# Altium PCB PCB2.PcbDoc
Units mm, origin at the board's own origin, x right, y up, seen from the top; angles counter-clockwise.
Board outline 85.85 x 65.79 mm, 2 copper layers (Top Layer, Bottom Layer); 18 components, 5 nets, 113 pads, 12 vias.
Unrouted connection lines stored in the file: 12.
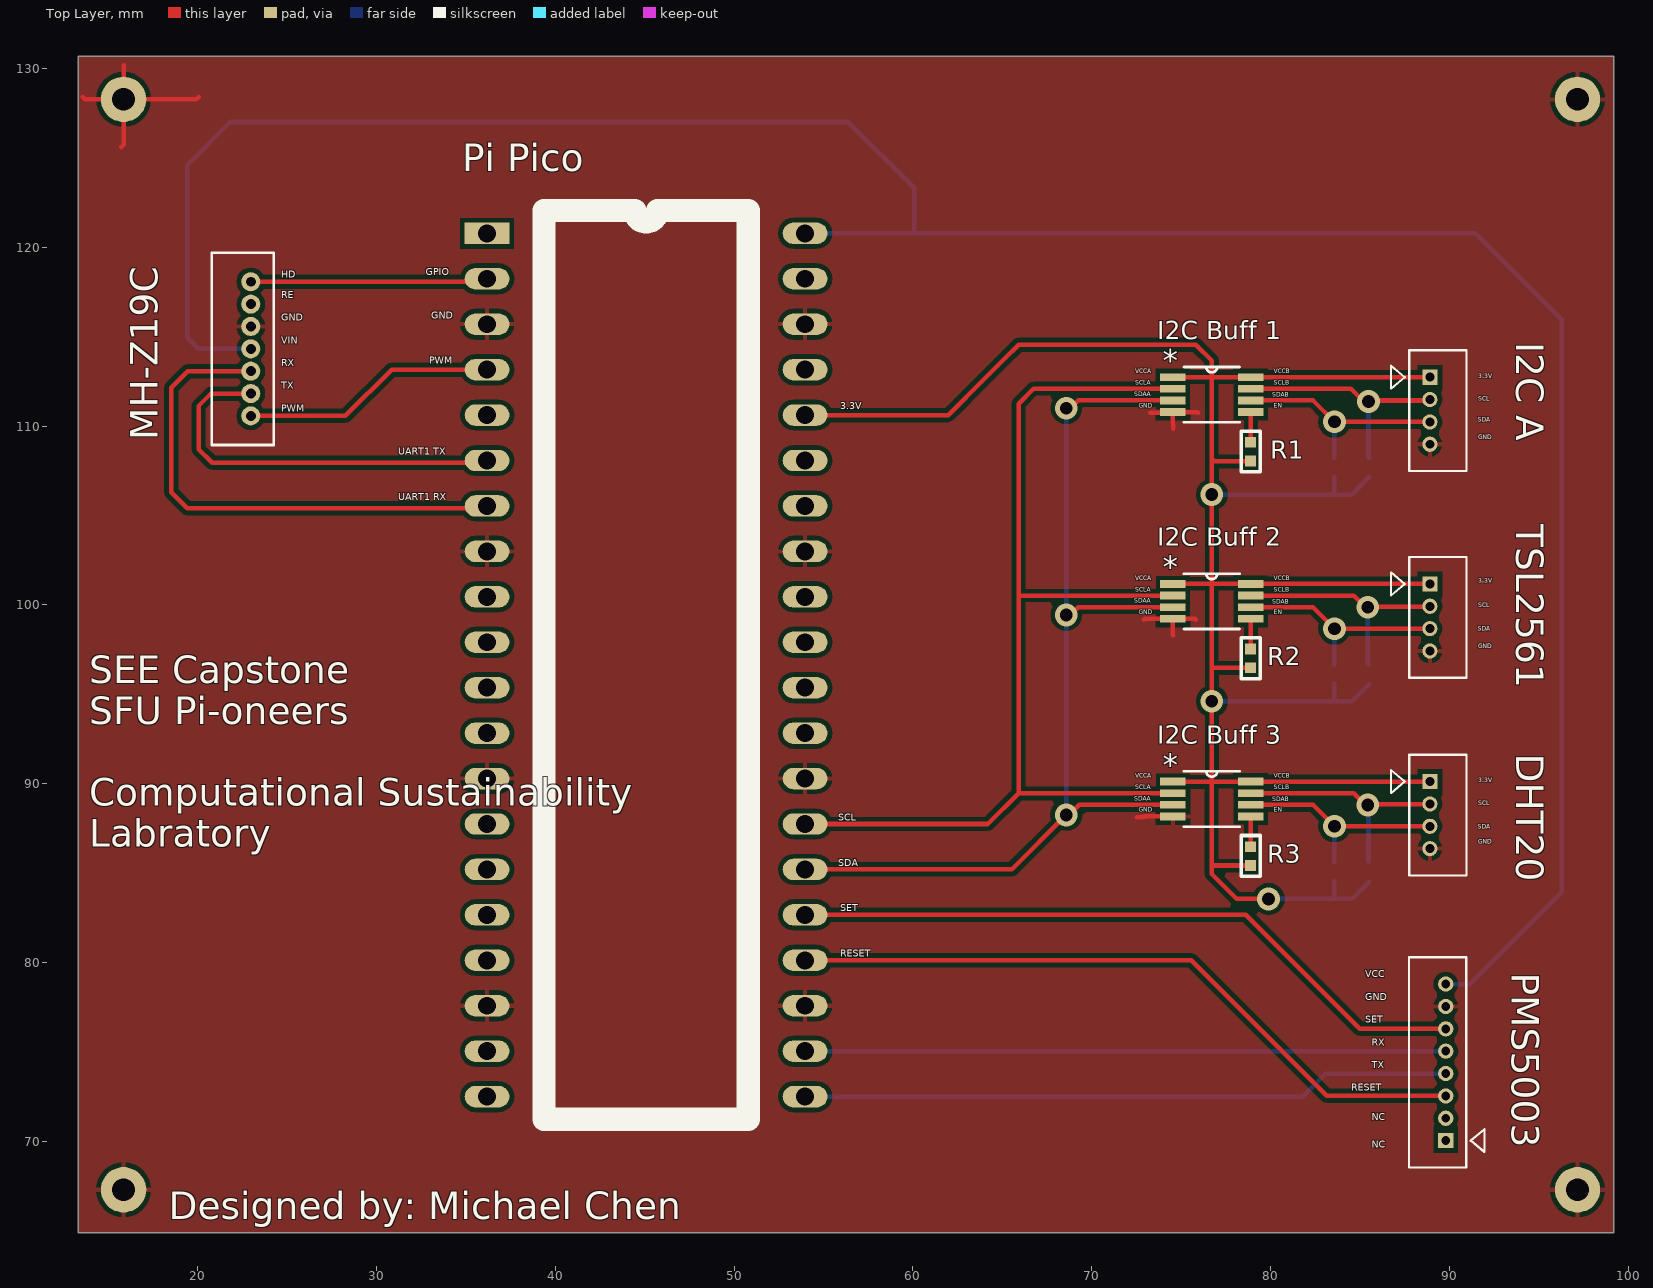
[diagram p0: Top Layer view]
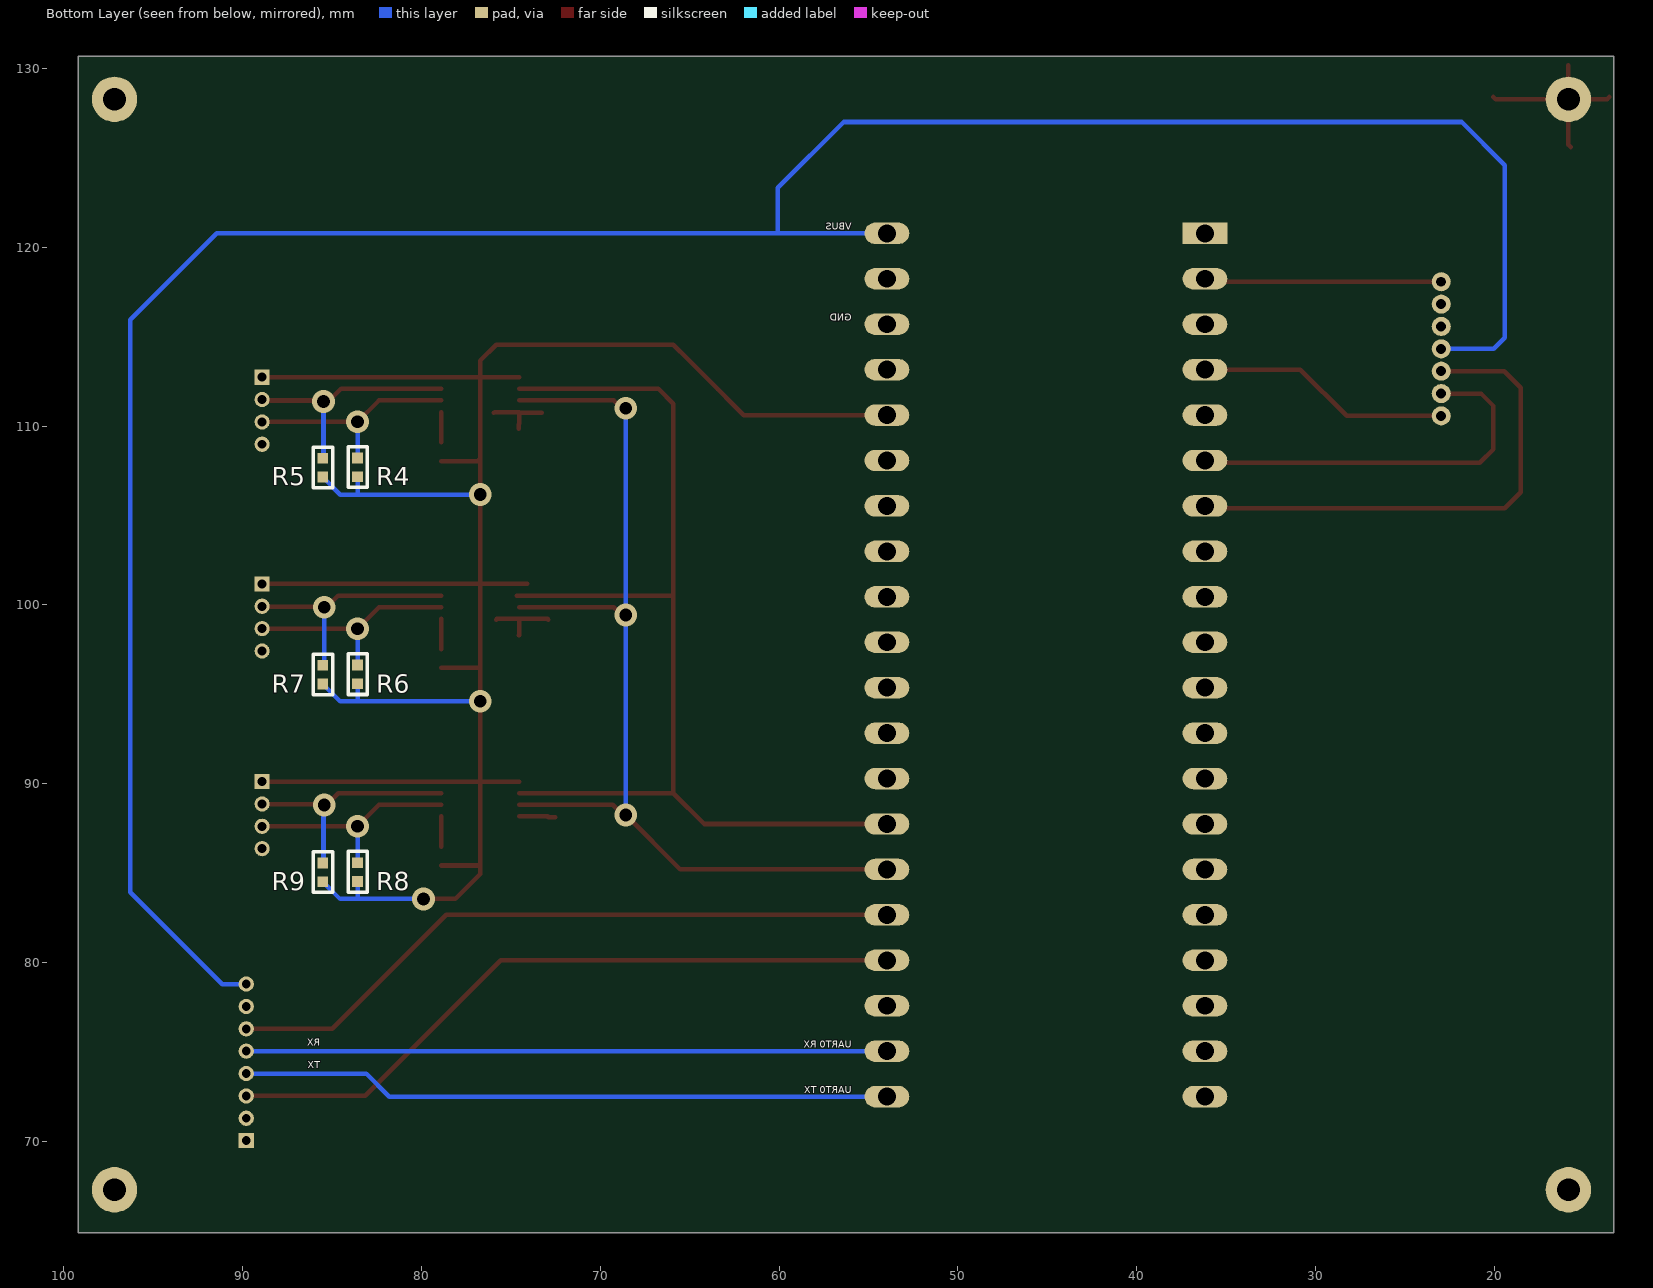
[diagram p1: Bottom Layer view, seen from below]
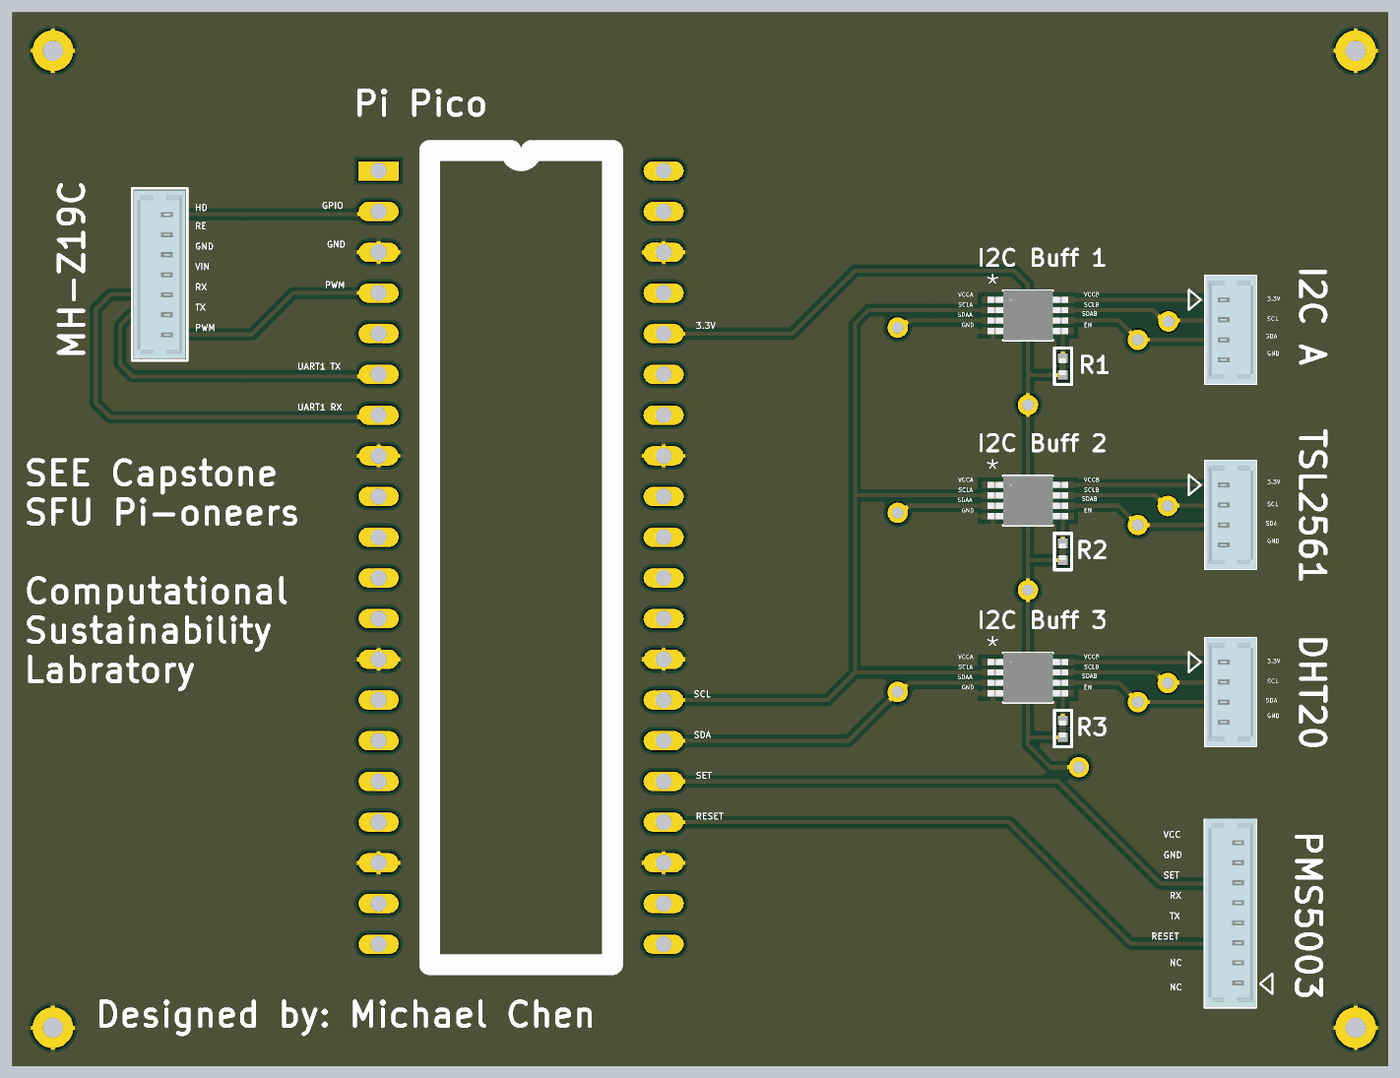
[diagram p2: 3D render of the assembled board from above, using the file's embedded part models]
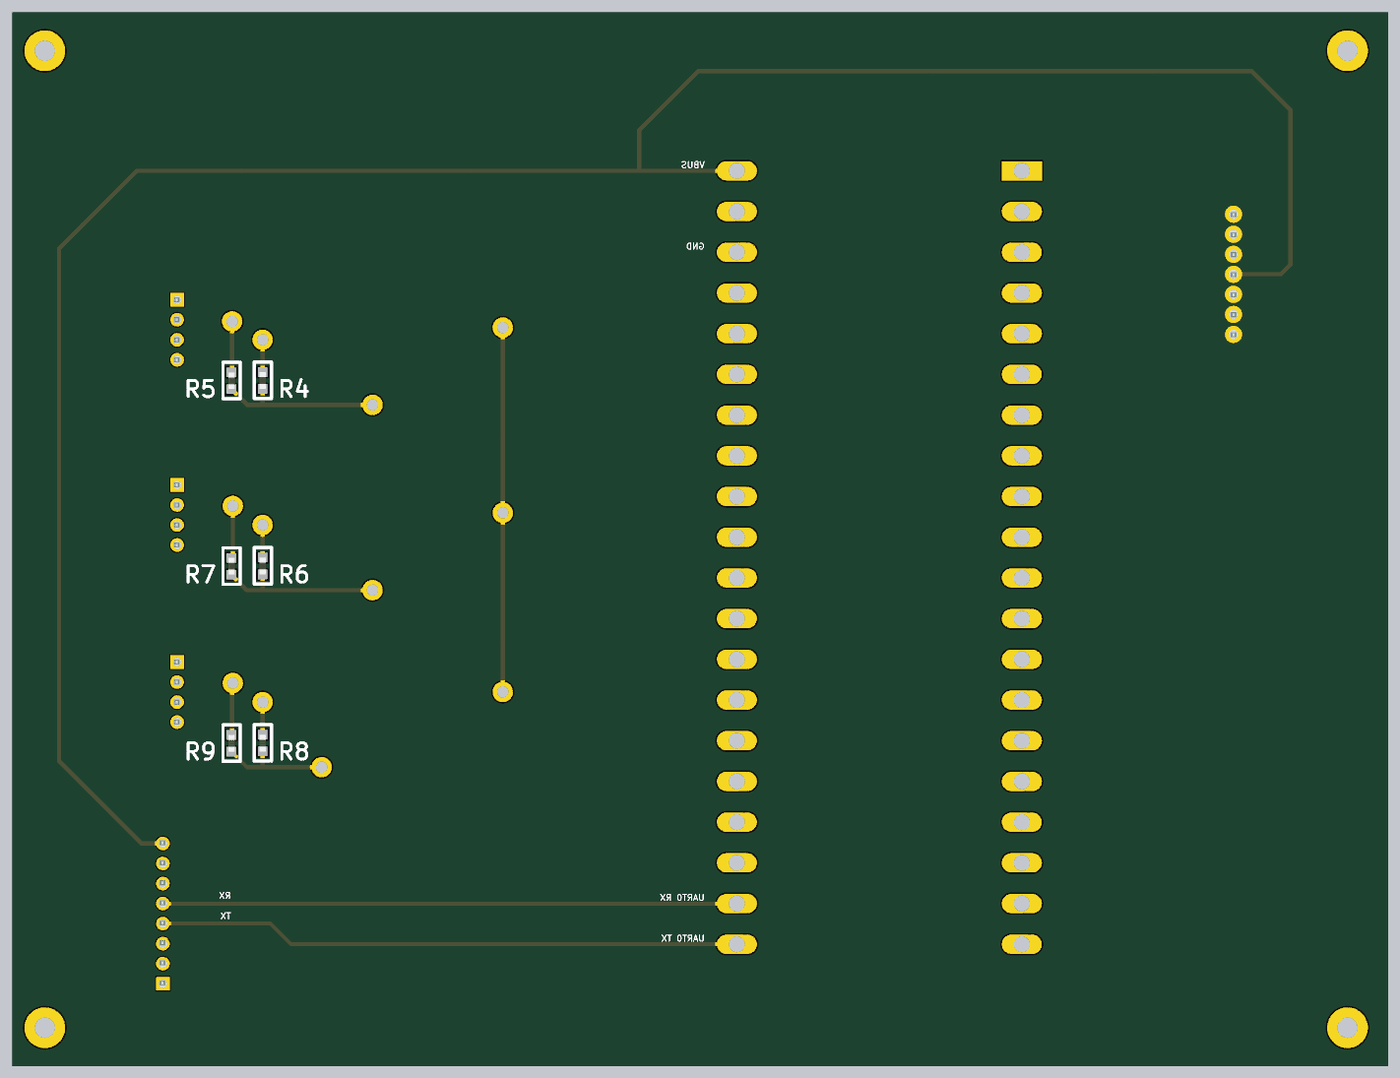
[diagram p3: 3D render of the assembled board from below, using the file's embedded part models]

## Layer stack, top to bottom
Top Solder: solder mask 0.0102, Solder Resist, Dk 3.5
Top Layer: signal copper 0.0356
Dielectric 1: dielectric 0.32, FR-4, Dk 4.8
Bottom Layer: signal copper 0.0356
Bottom Solder: solder mask 0.0102, Solder Resist, Dk 3.5

## Board outline
13.335,64.897 99.187,64.897 99.187,130.683 13.335,130.683

## Design rules (kind name [scope] priority, off if disabled: settings)
Clearance [All] p1: gap=0.254 ignorepadtopadclearanceinfootprint=FALSE
PolygonConnect [All] p1: connectstyle=Relief reliefconductorwidth=0.254 reliefentries=4 polygonreliefangle="90 Angle" airgapwidth=0.254
RoutingVias [All] p1: holewidth=0.711 width=1.27 viastyle="Through Hole" minholewidth=0.711 minwidth=1.27 maxholewidth=0.711 maxwidth=1.27
SolderMaskExpansion [All] p1: expansion=0.102 istentingtop=FALSE
Width [All] p1: maxlimit=0.254 minlimit=0.254 preferedwidth=0.254
30 further rules are at their usual default settings.

## Components (designator, comment, footprint, x,y, rotation, side; value= is the part's Value field where it differs from the comment)
DHT20 "Comment" "1X4 HEADER" 88.9,90.129 r90 top
"I2C A" "Comment" "1X4 HEADER" 88.9,112.735 r90 top
"I2C Buff 1" "Comment" DGK8 76.708,111.76 r0 top
"I2C Buff 2" "Comment" DGK8 76.708,100.203 r0 top
"I2C Buff 3" "Comment" DGK8 76.708,89.154 r0 top
MH-Z19C "Comment" "1X7 HEADER" 22.987,110.57 r270 top
"Pi Pico" "Comment" "PI PICO" 36.195,120.777 r0 top
PMS5003 "Comment" "1X8 HEADER" 89.789,70.057 r270 top
R1 "Comment" RESISTOR 78.88,108.568 r90 top
R2 "Comment" RESISTOR 78.88,97.011 r90 top
R3 "Comment" RESISTOR 78.88,85.962 r90 top
R4 "Comment" RESISTOR 83.566,107.696 r90 bottom
R5 "Comment" RESISTOR 85.509,107.679 r90 bottom
R6 "Comment" RESISTOR 83.566,96.122 r90 bottom
R7 "Comment" RESISTOR 85.509,96.105 r90 bottom
R8 "Comment" RESISTOR 83.566,85.073 r90 bottom
R9 "Comment" RESISTOR 85.509,85.056 r90 bottom
TSL2561 "Comment" "1X4 HEADER" 88.9,101.178 r90 top

## Footprints (in the part's own frame and the unit in brackets; to place one, negate y for a bottom-side part, rotate by r counter-clockwise, add the part's x,y. Pads: shape width x height; smd on the part's side, far side on the other; paste and mask are expansions set on the pad)
"1X4 HEADER" [mm]
  rect 0.85x0.85 / inner round 1.524 / far side rect 0.85x0.85 hole 0.5 paste-2539.97 mask+0.076: 1(0,0)
  round 0.85 / inner round 1.524 / far side round 0.85 hole 0.5 paste-2539.97 mask+0.076: 2(-1.25,0) 3(-2.5,0) 4(-3.75,0)
  silkscreen extent -5.25,-2.05 1.5,2.17, body extent -5.25,-2.07 1.5,1.13, height 4.21
"1X7 HEADER" [mil]
  round 42 / inner round 60 / far side round 42 hole 22 paste-99999 mask+0: 1(0,0) 2(-49.21,0) 3(-98.43,0) 4(-147.64,0) 5(-196.85,0) 6(-246.06,0) 7(-295.28,0)
  silkscreen extent -359,-86 64,50, body extent -353,-81 60,45, height 166
"1X8 HEADER" [mm]
  rect 0.85x0.85 / inner round 1.524 / far side rect 0.85x0.85 hole 0.5 paste-2539.97 mask+0.076: 1(0,0)
  round 0.85 / inner round 1.524 / far side round 0.85 hole 0.5 paste-2539.97 mask+0.076: 2(-1.25,0) 3(-2.5,0) 4(-3.75,0) 5(-5,0) 6(-6.25,0) 7(-7.5,0) 8(-8.75,0)
  silkscreen extent -10.25,-2.05 1.5,2.17, body extent -10.3,-2.03 1.45,1.17, height 4.21
DGK8 [mil]
  rect 56x17 smd paste-28 mask-28: 1(-85.5,38.39) 2(-85.5,12.8) 3(-85.5,-12.8) 4(-85.5,-38.39) 5(85.5,-38.39) 6(85.5,-12.8) 7(85.5,12.8) 8(85.5,38.39)
  silkscreen extent -61,-61 61,61, body extent -99,-61 99,61, height 43
"PI PICO" [mm]
  rect 2.5x1.2 hole 1: 1(0,0)
  oval 2.5x1.2 hole 1: 2(0,-2.54) 3(0,-5.08) 4(0,-7.62) 5(0,-10.16) 6(0,-12.7) 7(0,-15.24) 8(0,-17.78) 9(0,-20.32) 10(0,-22.86) 11(0,-25.4) 12(0,-27.94) 13(0,-30.48) 14(0,-33.02) 15(0,-35.56) 16(0,-38.1) 17(0,-40.64) 18(0,-43.18) 19(0,-45.72) 20(0,-48.26) 21(17.78,-48.26) 22(17.78,-45.72) 23(17.78,-43.18) 24(17.78,-40.64) 25(17.78,-38.1) 26(17.78,-35.56) 27(17.78,-33.02) 28(17.78,-30.48) 29(17.78,-27.94) 30(17.78,-25.4) 31(17.78,-22.86) 32(17.78,-20.32) 33(17.78,-17.78) 34(17.78,-15.24) 35(17.78,-12.7) 36(17.78,-10.16) 37(17.78,-7.62) 38(17.78,-5.08) 39(17.78,-2.54) 40(17.78,0)
  silkscreen extent 3.18,-49.53 14.6,1.27
RESISTOR [mm]
  rect 0.6x0.6 smd: 1(-0.525,0) 2(0.525,0)
  silkscreen extent -1.12,-0.55 1.15,0.53, body extent -0.52,-0.2 0.52,0.21, height 0.56

## Free pads (board coordinates)
  round 2.54 hole 1.27: 1(15.875,67.31) 1(15.875,128.27) 1(97.155,67.31) 1(97.155,128.27)

## Via types
v1: diameter 1.27, hole 0.711, Top Layer to Bottom Layer, 12 vias

## Nets (pads, with @x,y where several pads share a name; then routed paths per layer and width w, separated by ;. In a path a pad name is that pad's centre, name@x,y a point inside that pad or via, vN(x,y) a via of type N, cw(c..) or ccw(c..) an arc to the next point about the centre after c; other vN are vias at no path point)
3.3V: "I2C A.1" "I2C Buff 1.1" "I2C Buff 1.8" "I2C Buff 2.1" "I2C Buff 2.8" "I2C Buff 3.1" "I2C Buff 3.8" "Pi Pico.36" DHT20.1 TSL2561.1
5V: "Pi Pico.40" MH-Z19C.4 PMS5003.8 | length 144
  Bottom Layer w0.254: MH-Z19C.4 20.046,114.32 19.431,114.935 19.431,124.587 21.844,127 56.388,127 60.071,123.317 60.071,120.802 ; 53.975,120.777 60.071,120.777 91.44,120.777 ; PMS5003.8 91.126,78.807 96.266,83.947 96.266,115.951 91.458,120.759
GND: "I2C A.4" "I2C Buff 1.4" "I2C Buff 2.4" "I2C Buff 3.4" "Pi Pico.3" "Pi Pico.8" "Pi Pico.13" "Pi Pico.18" "Pi Pico.23" "Pi Pico.28" "Pi Pico.33" "Pi Pico.38" DHT20.4 MH-Z19C.5 pad.1 PMS5003.7 TSL2561.4 | length 20.8
  Top Layer w0.254: 13.589,128.397 13.716,128.27 pad.1@15.875,128.27 ; 15.748,125.603 15.875,125.73 pad.1@15.875,128.27 ; 15.875,130.175 pad.1@15.875,128.27 ; 20.066,128.397 19.939,128.27 pad.1@15.875,128.27 ; 72.517,88.138 72.898,88.138 72.939,88.179 74.536,88.179 ; 72.898,99.187 72.939,99.228 74.536,99.228 ; 73.279,110.744 74.495,110.744 74.536,110.785 ; 74.549,98.298 74.536,98.311 74.536,99.228 ; 74.549,99.215 74.536,99.228 ; 74.549,109.855 74.549,110.109 74.536,110.122 74.536,110.785 ; 74.549,110.772 74.536,110.785 ; 75.819,99.187 75.778,99.228 74.536,99.228 ; 75.946,110.744 75.905,110.785 74.536,110.785
SCL: "I2C Buff 1.2" "I2C Buff 2.2" "I2C Buff 2.7" "I2C Buff 3.2" "Pi Pico.27" | length 60.8
  Top Layer w0.254: 53.975,87.757 64.191,87.757 65.913,89.479 ; 65.913,100.528 74.663,100.528 ; 74.536,89.479 65.913,89.479 ; 74.536,112.085 66.746,112.085 65.913,111.252 65.913,99.131 65.913,89.479
SDA: "I2C Buff 1.3" "I2C Buff 2.3" "I2C Buff 3.3" "Pi Pico.26" | length 56.7
  Top Layer w0.254: 53.975,85.217 65.532,85.217 v1(68.58,88.265) 68.729,88.265 69.293,88.829 74.536,88.829 ; v1(68.58,110.998) 68.8,110.998 69.237,111.435 74.536,111.435 ; v1@68.894,99.635 68.994,99.635 69.237,99.878 74.536,99.878
  Bottom Layer w0.254: v1(68.58,88.265) 68.58,98.056 ; 68.58,98.044 v1(68.58,99.441) 68.58,105.41 v1(68.58,110.998)
pads on no net: "I2C A.2" "I2C A.3" "I2C Buff 1.5" "I2C Buff 1.6" "I2C Buff 1.7" "I2C Buff 2.5" "I2C Buff 2.6" "I2C Buff 3.5" "I2C Buff 3.6" "I2C Buff 3.7" "Pi Pico.1" "Pi Pico.2" "Pi Pico.4" "Pi Pico.5" "Pi Pico.6" "Pi Pico.7" "Pi Pico.9" "Pi Pico.10" "Pi Pico.11" "Pi Pico.12" "Pi Pico.14" "Pi Pico.15" "Pi Pico.16" "Pi Pico.17" "Pi Pico.19" "Pi Pico.20" "Pi Pico.21" "Pi Pico.22" "Pi Pico.24" "Pi Pico.25" "Pi Pico.29" "Pi Pico.30" "Pi Pico.31" "Pi Pico.32" "Pi Pico.34" "Pi Pico.35" "Pi Pico.37" "Pi Pico.39" DHT20.2 DHT20.3 MH-Z19C.1 MH-Z19C.2 MH-Z19C.3 MH-Z19C.6 MH-Z19C.7 PMS5003.1 PMS5003.2 PMS5003.3 PMS5003.4 PMS5003.5 PMS5003.6 R1.1 R1.2 R2.1 R2.2 R3.1 R3.2 R4.1 R4.2 R5.1 R5.2 R6.1 R6.2 R7.1 R7.2 R8.1 R8.2 R9.1 R9.2 TSL2561.2 TSL2561.3
copper on no net: | length 445.8
  Top Layer w0.254: 22.987,110.57 28.274,110.57 30.861,113.157 36.195,113.157 ; 22.987,111.82 20.761,111.82 20.066,111.125 20.066,108.712 20.828,107.95 36.195,107.95 ; 22.987,113.07 19.471,113.07 18.542,112.141 18.542,106.299 19.431,105.41 36.195,105.41 ; 22.987,118.07 36.195,118.07 ; 53.975,80.137 75.565,80.137 83.145,72.557 89.789,72.557 ; 53.975,82.677 78.613,82.677 84.983,76.307 89.789,76.307 ; 53.975,110.617 61.976,110.617 62.589,111.23 63.42,112.061 65.082,113.723 65.913,114.554 72.136,114.554 75.819,114.554 76.708,113.665 76.708,112.735 ; 74.082,101.178 74.663,101.178 ; 74.536,90.129 74.79,90.129 76.708,90.129 ; 74.536,101.178 76.708,101.178 ; 74.536,112.735 76.708,112.735 ; 76.708,99.781 76.708,101.178 ; 76.708,99.878 76.708,96.486 ; 76.869,85.437 78.88,85.437 ; 78.88,86.487 78.88,88.179 ; 78.88,88.829 82.367,88.829 v1(83.566,87.63) ; 78.88,89.479 84.105,89.479 84.307,89.479 84.651,89.479 85.312,88.818 v1(85.426,88.818) 85.457,88.848 88.848,88.848 ; 78.88,96.486 76.708,96.486 ; 78.88,97.536 78.88,99.228 ; 78.88,99.878 82.367,99.878 v1(83.566,98.679) ; 78.88,100.528 84.105,100.528 84.307,100.528 84.651,100.528 85.312,99.867 v1(85.426,99.867) 85.457,99.897 88.848,99.897 88.889,99.938 ; 78.88,108.043 76.857,108.043 76.708,108.192 ; 78.88,109.093 78.88,110.785 ; 78.88,111.435 82.367,111.435 v1(83.566,110.236) ; 78.88,112.085 84.105,112.085 84.49,112.085 85.196,111.379 v1(85.471,111.379) 85.524,111.432 88.847,111.432 88.9,111.485 ; v1(79.883,83.566) 78.105,83.566 76.708,84.963 76.708,90.129 ; v1(83.566,87.63) 88.9,87.629 ; v1(83.566,98.679) 88.9,98.678 ; v1(83.566,110.236) 88.9,110.235 ; 88.9,90.129 78.88,90.129 76.708,90.129 ; 88.9,101.178 78.88,101.178 76.708,101.178 ; 88.9,112.735 78.88,112.735 76.708,112.735 ; 76.708,90.129 v1(76.708,94.615) 76.708,96.486 ; 76.708,101.178 v1(76.708,106.172) 76.708,107.383 76.708,108.192 ; 76.708,108.192 76.708,108.458 76.708,112.735
  Bottom Layer w0.254: 53.975,72.517 81.788,72.517 83.078,73.807 89.789,73.807 ; 53.975,75.057 89.789,75.057 ; v1(76.708,94.615) 83.566,94.615 ; v1(76.708,106.172) 80.147,106.172 83.566,106.172 ; v1(79.883,83.566) 83.566,83.566 ; 83.566,84.548 83.566,83.566 ; 83.566,85.615 v1(83.566,87.63) ; 83.566,95.597 83.566,94.615 ; 83.566,96.664 v1(83.566,98.679) ; 83.566,107.171 83.566,106.172 ; 83.566,108.221 v1(83.566,110.236) ; v1(85.426,88.818) 85.471,88.773 85.471,85.636 ; v1(85.426,99.867) 85.426,96.729 85.471,96.685 ; v1(85.471,111.379) 85.471,108.242 85.509,108.204 ; 85.509,84.531 84.544,83.566 84.141,83.566 83.566,83.566 ; 85.509,95.58 84.544,94.615 84.141,94.615 83.566,94.615 ; 85.509,107.154 84.527,106.172 83.566,106.172

## Polygon pours and split planes (outlines as drawn)
GND on Top Layer "GND_L01_P001" (solid, pour order 1): 13.335,130.683 99.187,130.683 99.187,64.897 13.335,64.897

## Silkscreen, mask and mechanical layers (free items; w line width, h text height)
Top Overlay:
  text "GPIO" at 32.766,118.427 h0.38
  text "HD" at 24.701,118.3 h0.38
  text "RE" at 24.701,117.157 h0.38
  text "GND" at 33.084,116.014 h0.38
  text "GND" at 24.701,115.887 h0.38
  text "VIN" at 24.701,114.617 h0.38
  text "PWM" at 32.957,113.474 h0.38
  text "RX" at 24.701,113.347 h0.38
  text "VCCA" at 72.428,112.941 h0.25
  text "VCCB" at 80.175,112.941 h0.25
  text "3.3V" at 91.605,112.687 h0.25
  text "SCLA" at 72.428,112.306 h0.25
  text "SCLB" at 80.175,112.306 h0.25
  text "TX" at 24.701,112.078 h0.38
  text "SDAA" at 72.386,111.671 h0.25
  text "SDAB" at 80.095,111.633 h0.25
  text "SCL" at 91.605,111.417 h0.25
  text "GND" at 72.64,111.036 h0.25
  text "EN" at 80.175,111.036 h0.25
  text "3.3V" at 55.944,110.934 h0.38
  text "PWM" at 24.701,110.807 h0.38
  text "SDA" at 91.567,110.236 h0.25
  text "GND" at 91.605,109.258 h0.25
  text "UART1 TX" at 31.243,108.394 h0.38
  text "UART1 RX" at 31.243,105.855 h0.38
  text "VCCA" at 72.428,101.384 h0.25
  text "VCCB" at 80.175,101.384 h0.25
  text "3.3V" at 91.605,101.257 h0.25
  text "SCLA" at 72.428,100.749 h0.25
  text "SCLB" at 80.175,100.749 h0.25
  text "SDAA" at 72.386,100.114 h0.25
  text "SDAB" at 80.095,100.076 h0.25
  text "SCL" at 91.605,99.86 h0.25
  text "GND" at 72.64,99.479 h0.25
  text "EN" at 80.175,99.479 h0.25
  text "SDA" at 91.567,98.552 h0.25
  text "GND" at 91.605,97.574 h0.25
  text "VCCA" at 72.428,90.335 h0.25
  text "VCCB" at 80.175,90.335 h0.25
  text "3.3V" at 91.605,90.081 h0.25
  text "SCLA" at 72.428,89.7 h0.25
  text "SCLB" at 80.175,89.7 h0.25
  text "SDAA" at 72.386,89.065 h0.25
  text "SDAB" at 80.095,89.027 h0.25
  text "SCL" at 91.605,88.811 h0.25
  text "GND" at 72.64,88.43 h0.25
  text "EN" at 80.175,88.43 h0.25
  text "SCL" at 55.816,87.947 h0.38
  text "SDA" at 91.567,87.503 h0.25
  text "GND" at 91.605,86.652 h0.25
  text "SEE Capstone / SFU Pi-oneers /  / Computational Sustainability / Labratory" at 13.97,86.487 h1.52
  text "SDA" at 55.816,85.407 h0.38
  text "SET" at 55.944,82.867 h0.38
  text "RESET" at 55.944,80.328 h0.38
  text "VCC" at 85.281,79.184 h0.38
  text "GND" at 85.281,77.915 h0.38
  text "SET" at 85.281,76.644 h0.38
  text "RX" at 85.662,75.374 h0.38
  text "TX" at 85.662,74.105 h0.38
  text "RESET" at 84.519,72.834 h0.38
  text "NC" at 85.662,71.183 h0.38
  text "NC" at 85.662,69.659 h0.38
  text "Designed by: Michael Chen" at 18.415,65.659 h1.52
Bottom Overlay:
  text "VBUS" at 55.944,120.968 h0.38
  text "GND" at 55.944,115.887 h0.38
  text "RX" at 85.662,75.374 h0.38
  text "UART0 RX" at 55.944,75.248 h0.38
  text "TX" at 85.662,74.105 h0.38
  text "UART0 TX" at 55.944,72.707 h0.38

## Text inside footprints (layer, text, board x,y; h text height)
"I2C Buff 1": Top Overlay "*" at 73.965,113.04 h1.27; Mechanical 13 "*" at 73.965,113.04 h1.27
"I2C Buff 2": Top Overlay "*" at 73.965,101.483 h1.27; Mechanical 13 "*" at 73.965,101.483 h1.27
"I2C Buff 3": Top Overlay "*" at 73.965,90.434 h1.27; Mechanical 13 "*" at 73.965,90.434 h1.27